# Altium PCB RF-2530.PcbDoc
Units mil, origin at the board's own origin, x right, y up, seen from the top; angles counter-clockwise.
Board outline 1259.84 x 1567.69 mil, 2 copper layers (Top Layer, Bottom Layer); 32 components, 35 nets, 130 pads, 47 vias.
Unrouted connection lines stored in the file: 36.
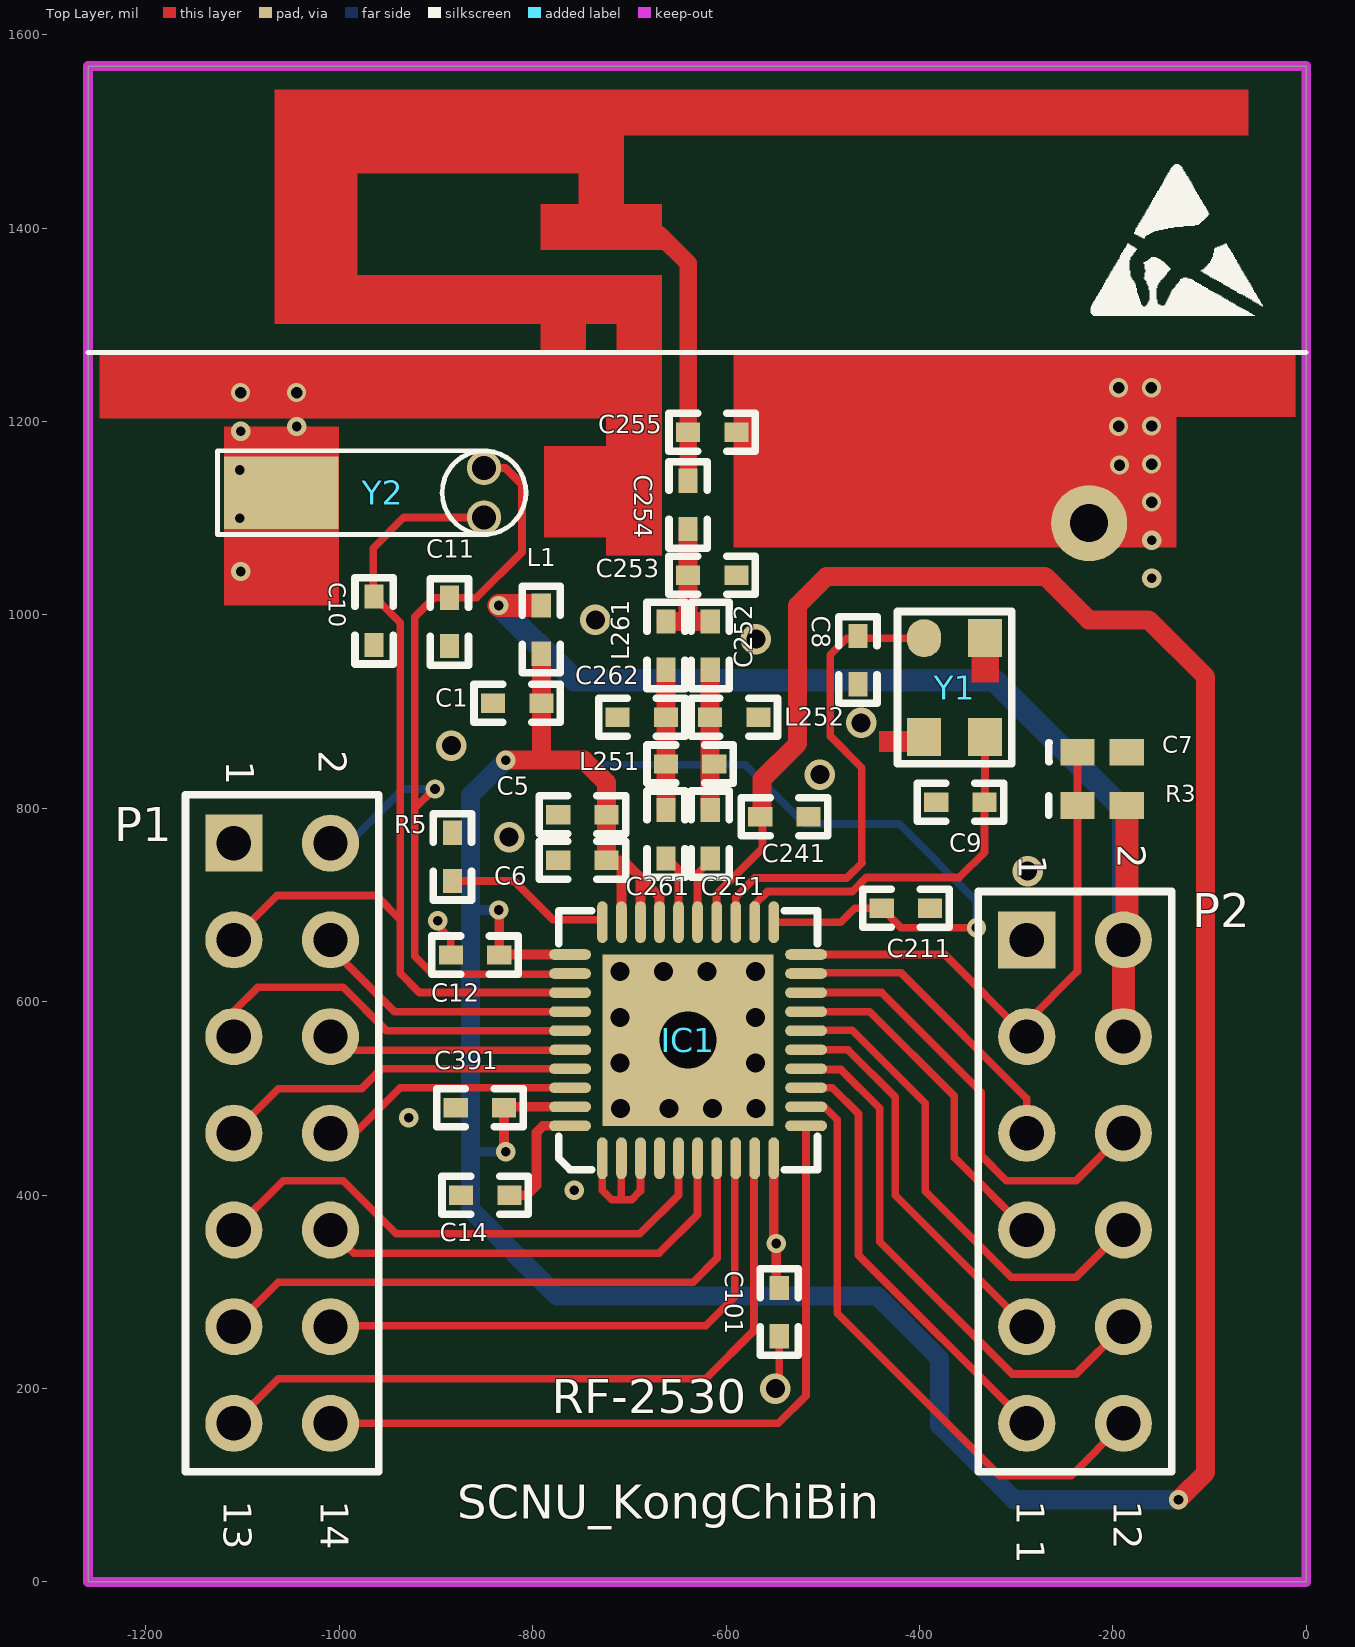
[diagram p0: Top Layer view]
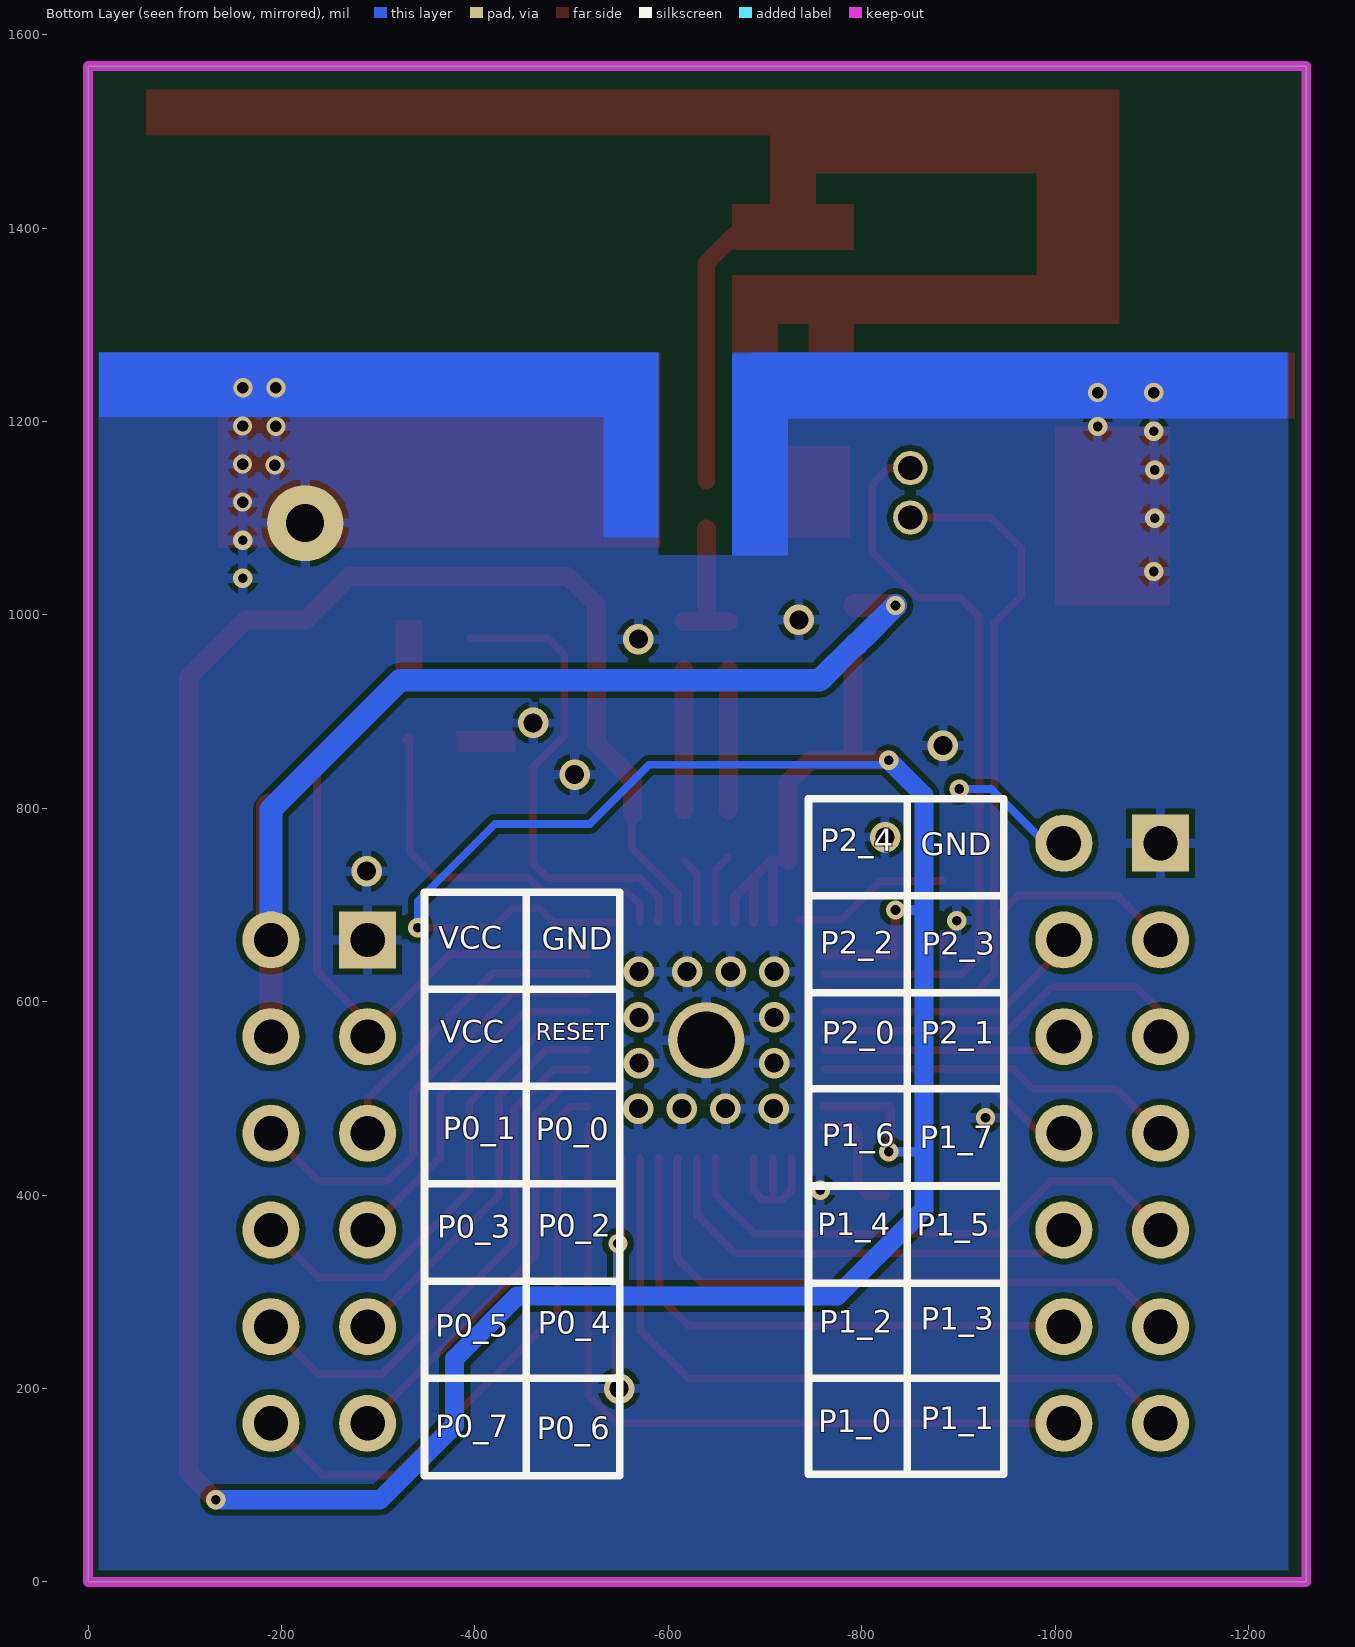
[diagram p1: Bottom Layer view, seen from below]

## Layer stack, top to bottom
Top Layer: signal copper 1.4
Dielectric: dielectric 12.6, FR-4, Dk 4.8
Bottom Layer: signal copper 1.4

## Board outline
-1259.84,0 0,0 0,1567.69 -1259.84,1567.69

## Design rules (kind name [scope] priority, off if disabled: settings)
Clearance Clearance_1 [All] p1 off: gap=15.75
Clearance [All] p2: gap=6
ComponentClearance [All] p1 off: gap=10 collisioncheckmode=3 verticalgap=10 showdistances=FALSE
FabricationTestPointUsage TestPointUsage [All] p1: valid=0 allowmultiple=FALSE
FabricationTestpoint Testpoint [All] p1: side=3 testpointundercomponent=TRUE minsize=40 maxsize=100 preferedsize=60 minholesize=0 maxholesize=40 preferedholesize=32 testpointgrid=1 allowsidetop=TRUE allowsidebottom=TRUE usegrid=TRUE gridtolerance=0.01
PolygonConnect [All] p1: connectstyle=Relief reliefconductorwidth=10 reliefentries=4 polygonreliefangle="90 Angle" airgapwidth=10
RoutingVias [All] p1: holewidth=10 width=20 viastyle="Through Hole" minholewidth=8 minwidth=19.68 maxholewidth=28 maxwidth=50
SolderMaskExpansion [All] p1: expansion=4
Width [All] p1: maxlimit=80 minlimit=7.87 preferedwidth=8
25 further rules are at their usual default settings.

## Components (designator, comment, footprint, x,y, rotation, side; value= is the part's Value field where it differs from the comment)
C1 "2.2u" 0402#1 -791.02,908.88 r180 top
C5 "0.1" 0402#1 -723.65,793.33 r180 top
C6 "220p" 0402#1 -723.65,746.33 r180 top
C7 "0.1" 0402#2 -211.11,858 r0 top
C8 "27pF" 0402#1 -463.65,978.33 r270 top
C9 "27pF" 0402#1 -332.65,806.33 r180 top
C10 "15pF" 0402#1 -964.11,1019 r270 top
C11 "15pF" 0402#1 -886.11,1017.88 r270 top
C12 "0.1" 0402#1 -834.65,648.33 r180 top
C14 "1uF" 0402#1 -824.11,400 r180 top
C101 "0.1" 0402#1 -545.11,304 r270 top
C211 "0.1" 0402#1 -439.1,696.66 r0 top
C241 "0.1" 0402#1 -564.65,791.33 r0 top
C251 "18p" 0402#1 -616.5,748.33 r90 top
C252 "1p" 0402#1 -616.5,943.33 r90 top
C253 "" 0402#1 -639.34,1041 r0 top
C254 "2.2p" 0402#1 -639.34,1088.9 r90 top
C255 "" 0402#1 -639.34,1189 r0 top
C261 "18p" 0402#1 -662.17,748.33 r90 top
C262 "1p" 0402#1 -662.17,894.33 r180 top
C391 "1u" 0402#1 -829.65,490.33 r180 top
IC1 "CC2530" PVQFN-N40 -727.92,438.21 r90 top locked
L1 "2nH" 0402#1 -791.02,959.88 r90 top
L251 "" 0402#1 -662.17,845.9 r0 top
L252 "2nH" 0402#1 -616.5,894.33 r0 top
L261 "2nH" 0402#1 -662.17,943.33 r90 top
P1 "Header 7X2" HDR2X7 -1109.11,764 r270 top locked
P2 "Header 6X2" HDR2X6 -289.11,664 r270 top locked
R3 "10K" 0402#2 -211.11,803 r0 top
R5 "56K" 0402#1 -883.02,724.88 r90 top
Y1 "32M" XT-SMD3225 -422.77,1003.6 r270 top
Y2 "32.768K" XT_3 -850.34,1100.9 r90 top

## Footprints (in the part's own frame and the unit in brackets; to place one, negate y for a bottom-side part, rotate by r counter-clockwise, add the part's x,y. Pads: shape width x height; smd on the part's side, far side on the other; paste and mask are expansions set on the pad)
0402#1 [mil]
  rect 25x20 smd: 1(0,0) 2(50,0)
  silkscreen extent -20,-20 70,20
0402#2 [mil] "Chip Capacitor; Body 1.0 x 0.5 mm (LxW typ)"
  rect 35.43x27.56 smd: 1(-25.59,0) 2(25.59,0)
  silkscreen extent -55,-10 -55,10
HDR2X6 [mm] "Connector; Header; 6x2 Position"
  rect 1.5x1.5 hole 0.9: 1(0,0)
  round 1.5 hole 0.9: 2(0,2.54) 3(2.54,0) 4(2.54,2.54) 5(5.08,0) 6(5.08,2.54) 7(7.62,0) 8(7.62,2.54) 9(10.16,0) 10(10.16,2.54) 11(12.7,0) 12(12.7,2.54)
  silkscreen extent -1.27,-1.27 13.97,3.81
HDR2X7 [mm] "Connector; Header; 7x2 Position"
  rect 1.5x1.5 hole 0.9: 1(0,0)
  round 1.5 hole 0.9: 2(0,2.54) 3(2.54,0) 4(2.54,2.54) 5(5.08,0) 6(5.08,2.54) 7(7.62,0) 8(7.62,2.54) 9(10.16,0) 10(10.16,2.54) 11(12.7,0) 12(12.7,2.54) 13(15.24,0) 14(15.24,2.54)
  silkscreen extent -1.27,-1.27 16.51,3.81
PVQFN-N40 [mm]
  oval 1.1x0.28 smd: 1(0,0) 2(0,-0.5) 3(0,-1) 4(0,-1.5) 5(0,-2) 6(0,-2.5) 7(0,-3) 8(0,-3.5) 9(0,-4) 10(0,-4.5) 21(6.2,-4.5) 22(6.2,-4) 23(6.2,-3.5) 24(6.2,-3) 25(6.2,-2.5) 26(6.2,-2) 27(6.2,-1.5) 28(6.2,-1) 29(6.2,-0.5) 30(6.2,0)
  oval 0.28x1.1 smd: 11(0.85,-5.35) 12(1.35,-5.35) 13(1.85,-5.35) 14(2.35,-5.35) 15(2.85,-5.35) 16(3.35,-5.35) 17(3.85,-5.35) 18(4.35,-5.35) 19(4.85,-5.35) 20(5.35,-5.35) 31(5.35,0.85) 32(4.85,0.85) 33(4.35,0.85) 34(3.85,0.85) 35(3.35,0.85) 36(2.85,0.85) 37(2.35,0.85) 38(1.85,0.85) 39(1.35,0.85) 40(0.85,0.85)
  rect 4.5x4.5 smd: 41(3.1,-2.25)
  silkscreen extent -0.3,-5.65 6.5,1.15
XT-SMD3225 [mm]
  oval 1x0.9 smd: 1(0.7,0.7)
  rect 1x0.9 smd: 2(3.3,2.3) 3(3.3,0.7) 4(0.7,2.3)
  silkscreen extent 0,0 4,3
XT_3 [mm]
  round 0.9 hole 0.635: 1(1.3,0) 2(0,0)
  rect 1.9x3 smd: ""(0.65,5.325)
  silkscreen extent -0.45,-1.1 1.75,7

## Part data
C1 C5 C6 C7 C8 C9 C10 C11 C12 C14 C101 C211 C241 C251 C252 C253 C254 C255 C261 C262 C391: library part CAP, "Capacitor"
IC1: library part CC2430
L1 L251 L252 L261: library part INDUCTOR
P1: "Header, 7-Pin, Dual row"
P2: "Header, 6-Pin, Dual row"
R3 R5: library part RES2
Y1: library part CRY
Y2: library part CRYSTAL, "Crystal"

## Free pads (board coordinates)
  round 78.74 hole 59.06: 0(-639.34,560.26)
  round 78.74 hole 39.37: 1(-224.54,1095)

## Via types
v1: diameter 31.5, hole 19.68, Top Layer to Bottom Layer, 20 vias
v2: diameter 20, hole 10, Top Layer to Bottom Layer, 18 vias
v3: diameter 19.68, hole 11.81, Top Layer to Bottom Layer, 9 vias

## Nets (pads, with @x,y where several pads share a name; then routed paths per layer and width w, separated by ;. In a path a pad name is that pad's centre, name@x,y a point inside that pad or via, vN(x,y) a via of type N, cw(c..) or ccw(c..) an arc to the next point about the centre after c; other vN are vias at no path point)
1VCC1.8: C14.1 IC1.40 | length 124.6
  Top Layer w10: C14.1 -806.11,400 -796.11,410 -796.11,465 -789.43,471.68 IC1.40
CSN: IC1.6 P1.10 | length 464.3
  Top Layer w8: P1.10 -985.11,340 -669.5,340 -629.5,380 IC1.6
DC: IC1.34 P1.4 | length 283.2
  Top Layer w8: P1.4 -1009.11,656 -942.9,589.79 IC1.34
DD: IC1.35 P1.5 | length 402.7
  Top Layer w8: P1.5 -1109.11,590 -1084.11,615 -996.11,615 -951.21,570.1 IC1.35
GND: C1.2 C5.2 C6.2 C7.2 C8.2 C9.2 C10.2 C11.2 C12.2 C14.2 C101.2 C211.2 C241.2 C253.2 C254.2 C255.1 C255.2 C262.2 C391.2 IC1.1 IC1.2 IC1.3 IC1.4 IC1.41 L252.2 P1.1 P2.1 pad.0 pad.1 R5.2 Y1.3 Y1.4 Y2. | length 515.6
  Top Layer w7.87: v2@-903.34,683.9 -884.65,665.21 C12.2 ; IC1.1 -727.92,405.19 -718.11,395.38 -697.49,395.38 -688.55,404.32 IC1.3 ; -708.24,396.5 IC1.2 ; v1@-545.11,204 C101.2
  Top Layer w18.11: -668.87,1393.28 -639.34,1363.75 ; C254.2 -639.34,1363.71
  other v1: -549.11,200 -709.07,489.39 -659.07,489.39 -614.07,489.39 -569.07,489.39 -709.61,536.64 -569.61,536.64 -709.61,583.88 -569.61,583.88 -709.61,631.13 -664.61,631.13 -619.61,631.13 -569.61,631.13 -288.11,735 -824.34,770.23 -503.11,835 -884.11,865 -460.34,888.34 -569.11,975 -735.11,995
  other v2: -757.11,405 -928.11,480 -898.34,683.9 -159.92,1037.95 -1102.11,1045 -159.92,1077.32 -1103.11,1100 -1103.11,1150 -1102.11,1190 -1044.11,1195
  other v3: -159.92,1116.69 -193.11,1155 -159.92,1156.06 -194.11,1195 -159.92,1195.43 -1102.11,1230 -1044.11,1230 -194.11,1235 -160.11,1235
LED1: IC1.11 P1.14 | length 782.6
  Top Layer w8: P1.14 -546.11,164 -517.29,192.82 IC1.11
LED2: IC1.9 P1.13 | length 756.2
  Top Layer w8: P1.13 -1063.11,210 -621.15,210 -571.15,260 -571.15,437.5 IC1.9
MISO: IC1.37 P1.7 | length 375.4
  Top Layer w8: P1.7 -1063.11,510 -977.11,510 -956.38,530.73 IC1.37
MOSI: IC1.38 P1.8 | length 267.2
  Top Layer w8: P1.8 -984.11,464 -937.06,511.05 IC1.38
NetC1_1: C1.1 C5.1 C6.1 C12.1 C101.1 C211.1 C241.1 C391.1 IC1.10 IC1.21 IC1.24 IC1.27 IC1.28 IC1.29 IC1.31 IC1.39 L1.1 | length 4885.1
  Top Layer w8: IC1.24 -609.81,711.42 -562.34,758.9 -562.34,789.02 C241.1 ; IC1.21 -481.33,682.31 -466.98,696.66 C211.1 -419.1,676.66 v2(-341.11,676.66)
  Top Layer w10: v2@-834.65,694.51 C12.1 -834.14,648.84 IC1.31 ; v2@-829.65,446.51 C391.1 -828.62,491.36 IC1.39 ; C6.1@-722.2,744.88 C6.1 -706.3,746.33 -668.87,708.9 IC1.27 ; -709.02,744.88 -704.85,744.88 ; IC1.29 -708.24,744.09 ; IC1.28 -688.55,728.58 ; v2@-550.76,352.65 IC1.10 ; v2(-548.11,350) -548.11,307 C101.1
  Top Layer w19.68: v2(-828.02,849.88) -747.02,849.88 -723.65,826.51 C6.1 ; L1.1 -791.02,851.88 -789.02,849.88 ; C241.1@-563.02,792.96 -563.02,829.88 -526.02,866.88 -526.02,1009.88 -496.02,1039.88 -269.99,1039.88 -225.11,995 -163.11,995 -104.11,936 -104.11,113 v2(-132.11,85)
  Bottom Layer w8: v2(-828.02,849.88) -823.14,845 -580.11,845 -519.06,783.95 -421.06,783.95 -341.11,704 v2(-341.11,676.66)
  Bottom Layer w10: -864.28,444.88 v2(-828.02,444.88) ; -864.28,694.88 v2(-835.02,694.88) ; -548.11,297.57 -546.26,295.72 ; v2(-548.11,350) -548.11,306.43 -537.4,295.72
  Bottom Layer w19.68: v2(-828.02,849.88) -864.28,813.63 -864.28,385.13 -774.87,295.72 -443.83,295.72 -379.11,231 -379.11,162 -302.11,85 v2(-132.11,85)
NetC8_1: C8.1 IC1.23 Y1.1 | length 506.8
  Top Layer w8: IC1.23@-588.34,684.09 IC1.23 -590.13,708.11 -570.28,727.96 -475.28,727.96 -459.34,743.9 -459.65,744.21 -459.65,842.15 -492.34,874.83 -492.34,958.9 -475.2,976.04 Y1.1
NetC9_1: C9.1 IC1.22 Y1.2 | length 401.1
  Top Layer w8: IC1.22 -570.44,700.7 -557.18,713.96 -483.34,713.96 -469.48,713.96 -454.85,728.58 -358.84,728.58 -332.65,754.76 C9.1 ; C9.1@-332.22,806.33 Y1.2
  Top Layer w10: Y1.2 Y1.2@-329.65,871.11
NetC251_1: C251.1 IC1.25 | length 68.8
  Top Layer w8: IC1.25 -629.5,732.74 C251.1@-616.5,745.73
NetC251_2: C251.2 C252.1 L251.2 L252.1 | length 145
  Top Layer w19.68: C251.2 C252.1
NetC252_2: C252.2 C253.1 C254.1 L261.2 | length 140.9
  Top Layer w19.68: L261.2 C252.2 ; -639.34,993.65 C254.1
NetC254_2: 
NetC261_1: C261.1 IC1.26 | length 71.6
  Top Layer w8: C261.1@-661.34,748.9 -649.18,736.74 IC1.26
NetC261_2: C261.2 C262.1 L251.1 L261.1 | length 145
  Top Layer w19.68: C261.2 L261.1
NetIC1_30: IC1.30 R5.1 | length 164.6
  Top Layer w8: R5.1 -819.02,724.88 -779.02,684.88 -735.02,684.88
P00: IC1.19 P2.5 | length 318.2
  Top Layer w8: IC1.19 -516.57,629.88 -419.11,629.88 -289.11,499.88 P2.5
P01: IC1.18 P2.6 | length 467.4
  Top Layer w8: IC1.18 -439.11,609.47 -336.11,506.47 -336.11,441 -310.11,415 -238.11,415 P2.6
P1.2: IC1.8 P1.12 | length 574.5
  Top Layer w8: P1.12 -1008.11,265 -621.02,265 -591.02,295 -591.02,437.32 IC1.8
P1.3: IC1.7 P1.11 | length 633
  Top Layer w8: P1.11 -1063.11,310 -634.02,310 -609.02,335 -609.02,437.42 IC1.7
P02: IC1.17 P2.7 | length 358.9
  Top Layer w8: IC1.17 -451.32,589.79 -364.11,502.57 -364.11,439 P2.7
P03: IC1.16 P2.8 | length 508
  Top Layer w8: IC1.16@-517.07,569.88 IC1.16 -516.98,570.42 -469.53,570.42 -394.11,495 -394.11,404 -305.11,315 -238.11,315 P2.8
P04: IC1.15 P2.9 | length 406.3
  Top Layer w8: IC1.15 -474.02,550.42 -425.11,501.5 -425.11,400 P2.9
P05: IC1.14 P2.10 | length 560
  Top Layer w8: IC1.14 -516.44,529.88 -481.23,529.88 -441.11,489.76 -441.11,352 -304.11,215 -238.11,215 P2.10
P06: IC1.13 P2.11 | length 457.9
  Top Layer w8: IC1.13@-516.98,511.36 IC1.13 -490.16,511.05 -463.11,484 -463.11,338 P2.11
P07: IC1.12 P2.12 | length 625.7
  Top Layer w8: IC1.12 -498.47,491.36 -485.11,478 -485.11,278 -317.11,110 -243.11,110 P2.12
P20: IC1.36 P1.6 | length 253.8
  Top Layer w8: P1.6 -994.99,549.88 -761.92,549.88 IC1.36
P23: C10.1 IC1.33 P1.3 Y2.2 | length 965
  Top Layer w8: P1.3 -1109.11,665 -1064.11,710 -962.11,710 -937.11,685 ; Y2.2 -933.21,1100.9 -965.02,1069.09 -965.02,1019.88 -937.11,991.97 -937.11,629.47 -917.11,609.47 IC1.33
P24: C11.1 IC1.32 P1.2 Y2.1 | length 934.9
  Top Layer w8: -922.02,800 -902.02,820 v2(-901.11,820) ; Y2.1 -828.19,1152.08 -811.11,1135 -811.11,1065 -858.23,1017.88 -902.11,1017.88 -922.02,997.97 -922.02,647.24 -903.11,628.33 -762.21,628.33 IC1.32
  Bottom Layer w8: P1.2 -990.11,764 -934.11,820 v2(-901.11,820)
RESET_N: C7.1 IC1.20 P2.3 R3.1 | length 579
  Top Layer w8: IC1.20 -373.95,648.84 P2.3 -289.11,579 -236.7,631.41 C7.1
SCK: IC1.5 P1.9 | length 558.6
  Top Layer w8: P1.9 -1058.11,415 -996.11,415 -941.11,360 -689.18,360 -649.18,400 IC1.5
VDD_3.3V: L1.2 P2.2 P2.4 R3.2 | length 1146.6
  Top Layer w23.62: v2(-835.02,1009.88) L1.2@-793.1,1009.88 ; P2.4@-189.11,560.97 P2.2 -185.52,667.59 R3.2
  Bottom Layer w23.62: v2(-835.02,1009.88) -800.14,975 ; -795.14,970 -794.11,970 -756.61,932.5 -322.61,932.5 -189.11,799 P2.2

## Polygon pours and split planes (outlines as drawn)
GND on Bottom Layer "GND" (solid, remove dead copper, pour order 1001): -1240.47,1271.63 -667.34,1271.63 -666.11,1270.4 -666.11,1061.57 -589.57,1061.57 -589.57,1093.58 -589.57,1271.63 -590.11,1271.63 -11.11,1271.63 -11.11,11.89 -11.81,11.89 -1241.14,11.89 -1241.14,17.8 -1241.14,1271.63 -1240.47,1271.63

## Keep-outs
Keep-Out Layer:
  lines w10: -1259.84,0 0,0 0,1186.1 0,1567.69 -1259.84,1567.69 -1259.84,1186.1 -1259.84,0

## Other copper
Top Layer:
  rectangle net GND: -1248.11,1203.3 -685.43,1271.63
  rectangle net GND: -724.11,1061.57 -666.11,1270.4
  region net GND: -11.11,1271.63 -573.11,1271.63 -573.11,1205 -11.11,1205
  rectangle net GND: -1119.11,1010 -1000.11,1195
  rectangle net GND: -788.11,1080 -685.43,1175
  rectangle net GND: -592.11,1070 -134.11,1271.63
  rectangle net GND: -792.09,1270.4 -744.85,1301.89
  rectangle net GND: -1066.9,1351.55 -981.07,1543.67
  rectangle net GND: -981.07,1456.67 -752.72,1543.67
  rectangle net GND: -752.72,1425.17 -705.48,1543.67
  rectangle net GND: -713.35,1270.4 -666.11,1301.89
  rectangle net GND: -1066.9,1300.76 -666.11,1351.55
  rectangle net GND: -792.09,1377.53 -666.11,1425.17
  rectangle net GND: -705.48,1496.04 -59.81,1543.67
  rectangle net GND: -346.11,930 -317.92,995
  rectangle net GND: -442.11,858.43 -381.11,880
Bottom Layer:
  rectangle net GND: -1240.47,1203.3 -685.43,1271.63
  rectangle net GND: -724.11,1061.57 -666.11,1270.4
  rectangle net GND: -590.11,1080 -533.11,1271.63
  region net GND: -11.11,1271.63 -573.11,1271.63 -573.11,1205 -11.11,1205

## Silkscreen, mask and mechanical layers (free items; w line width, h text height)
Top Overlay:
  drawing of 300 lines, arcs and shapes, not listed
  text "RF-2530" at -780.51,162.48 h60
  text "SCNU_KongChiBin" at -877.95,53.23 h60
Bottom Overlay:
  lines w7.87: -946.85,111.22 -745.08,111.22 -745.08,211.61 ; -946.85,111.61 -946.85,211.61 ; -946.85,210.63 -745.08,210.63 -745.08,311.02 ; -946.85,211.02 -946.85,311.02 ; -946.85,309.06 -745.08,309.06 -745.08,409.45 ; -946.85,309.45 -946.85,409.45 -745.08,409.45 ; -946.85,409.84 -946.85,509.84 -745.08,509.84 ; -946.85,510.24 -946.85,610.24 ; -946.85,609.25 -745.08,609.25 -745.08,709.65 ; -946.85,609.65 -946.85,709.65 -745.08,709.65 ; -946.85,710.04 -946.85,810.04 -745.08,810.04 -745.08,709.65 ; -847,111.22 -847,810.04 ; -745.08,610.24 -745.08,509.84 ; -549.72,109.77 -347.95,109.77 -347.95,210.17 ; -549.72,110.17 -549.72,210.17 ; -549.72,210.77 -347.95,210.77 -347.95,311.17 ; -549.72,211.17 -549.72,311.17 -549.72,411.17 ; -549.72,310.77 -347.95,310.77 -347.95,411.17 ; -549.72,411.77 -347.95,411.77 -347.95,512.17 ; -549.72,412.17 -549.72,512.17 ; -549.72,512.77 -347.95,512.77 -347.95,613.17 ; -549.72,513.17 -549.72,613.17 -549.72,713.17 -347.95,713.17 -347.95,612.77 -549.72,612.77 ; -453,713.17 -453,109.77 -452,109.77 ; -745.08,409.45 -745.08,509.84
  text "P2_4" at -757,748 h40
  text "GND" at -861,744 h40
  text "VCC" at -362,647 h40
  text "GND" at -469,646 h40
  text "P2_2" at -757,642 h40
  text "P2_3" at -862,641 h40
  text "RESET" at -463,554 h30
  text "VCC" at -364,550 h40
  text "P2_1" at -861,549 h40
  text "P2_0" at -759,549 h40
  text "P0_1" at -367,450 h40
  text "P0_0" at -463,449 h40
  text "P1_6" at -759,443 h40
  text "P1_7" at -860,441 h40
  text "P1_4" at -754,351 h40
  text "P1_5" at -857,350 h40
  text "P0_2" at -465,349 h40
  text "P0_3" at -361,348 h40
  text "P1_3" at -861,253 h40
  text "P1_2" at -756,250 h40
  text "P0_4" at -465,249 h40
  text "P0_5" at -359,246 h40
  text "P1_1" at -861,150 h40
  text "P1_0" at -755,147 h40
  text "P0_7" at -359,142 h40
  text "P0_6" at -464,140 h40
Mechanical 1:
  lines w10: -1259.84,5 -1259.84,1186.1 -1259.84,1567.69 0,1567.69 0,1186.1 0,5 -1259.84,5

## Text inside footprints (layer, text, board x,y; h text height)
P1: Top Overlay "13" at -1129.11,84 h50 r270; Top Overlay "14" at -1029.11,84 h50 r270; Top Overlay "1" at -1127,849 h50 r270; Top Overlay "2" at -1031,860 h50 r270
P2: Top Overlay "2" at -205,763 h50 r270; Top Overlay "1" at -307,752 h50 r270; Top Overlay "1" at -309.11,84 h50 r270; Top Overlay "1" at -309.11,44 h50 r270; Top Overlay "12" at -209.11,84 h50 r270